# EAGLE board Qwiic_Spectral_Sensor-AS7265x-Panel (EAGLE 9.2.1), part 1 of 2
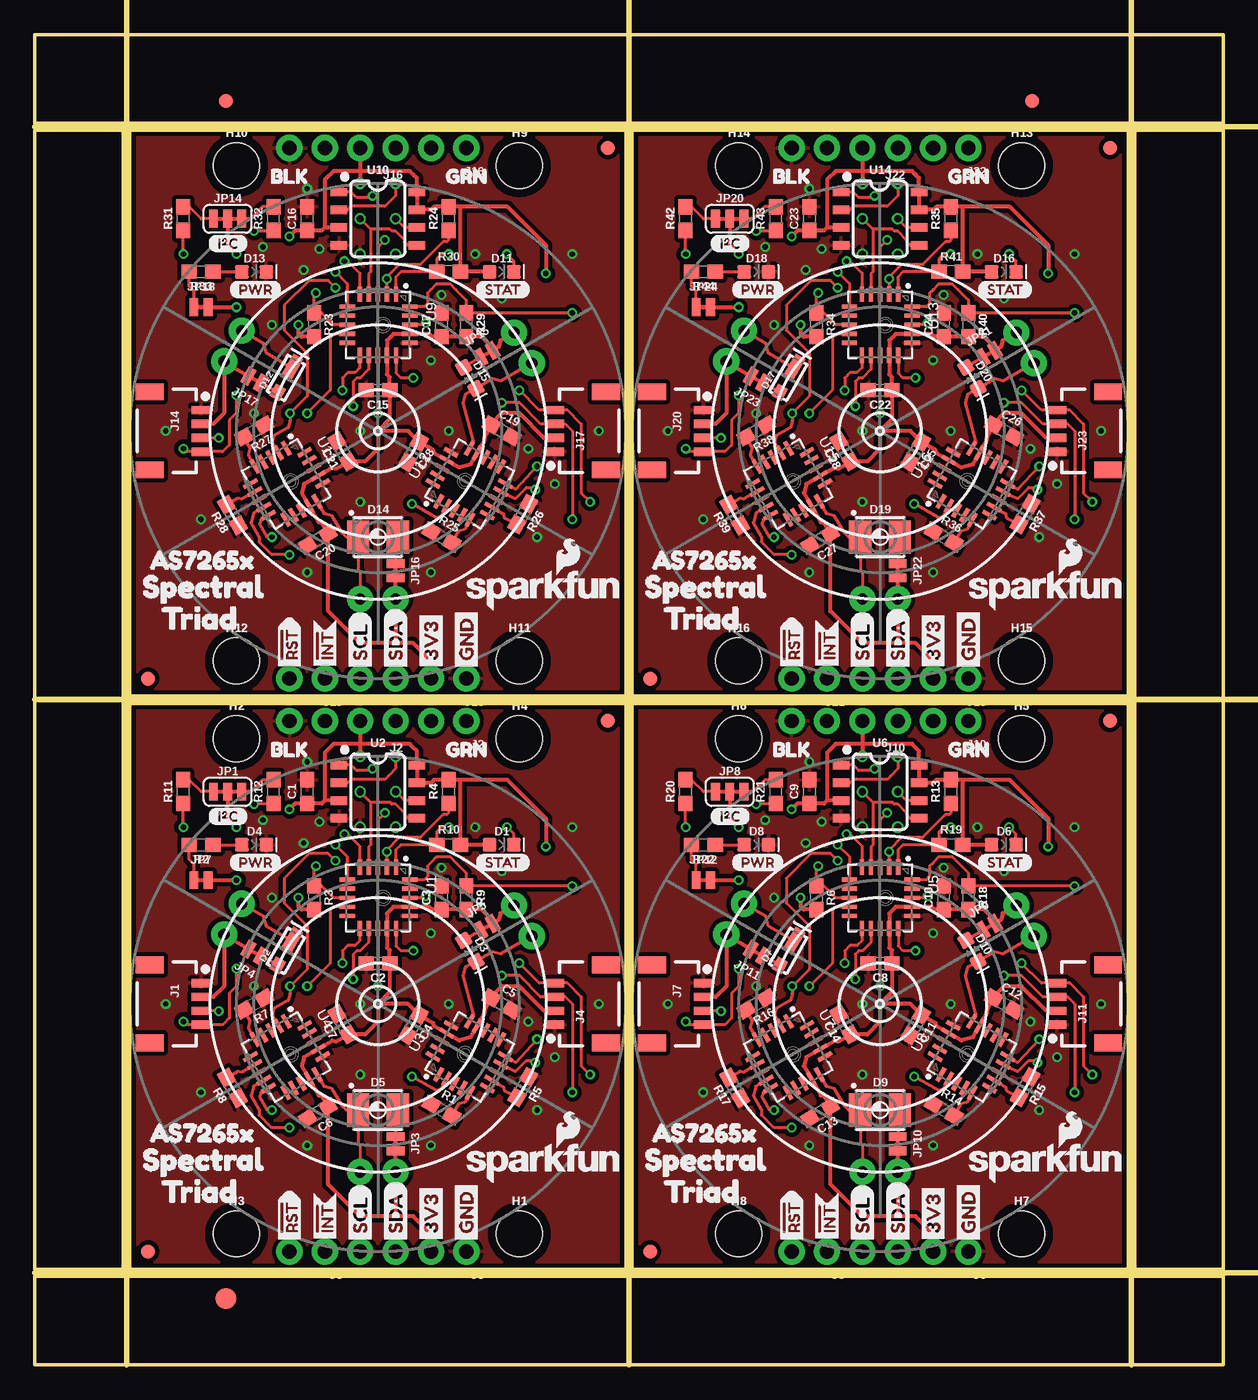
[diagram p0: board, top side]
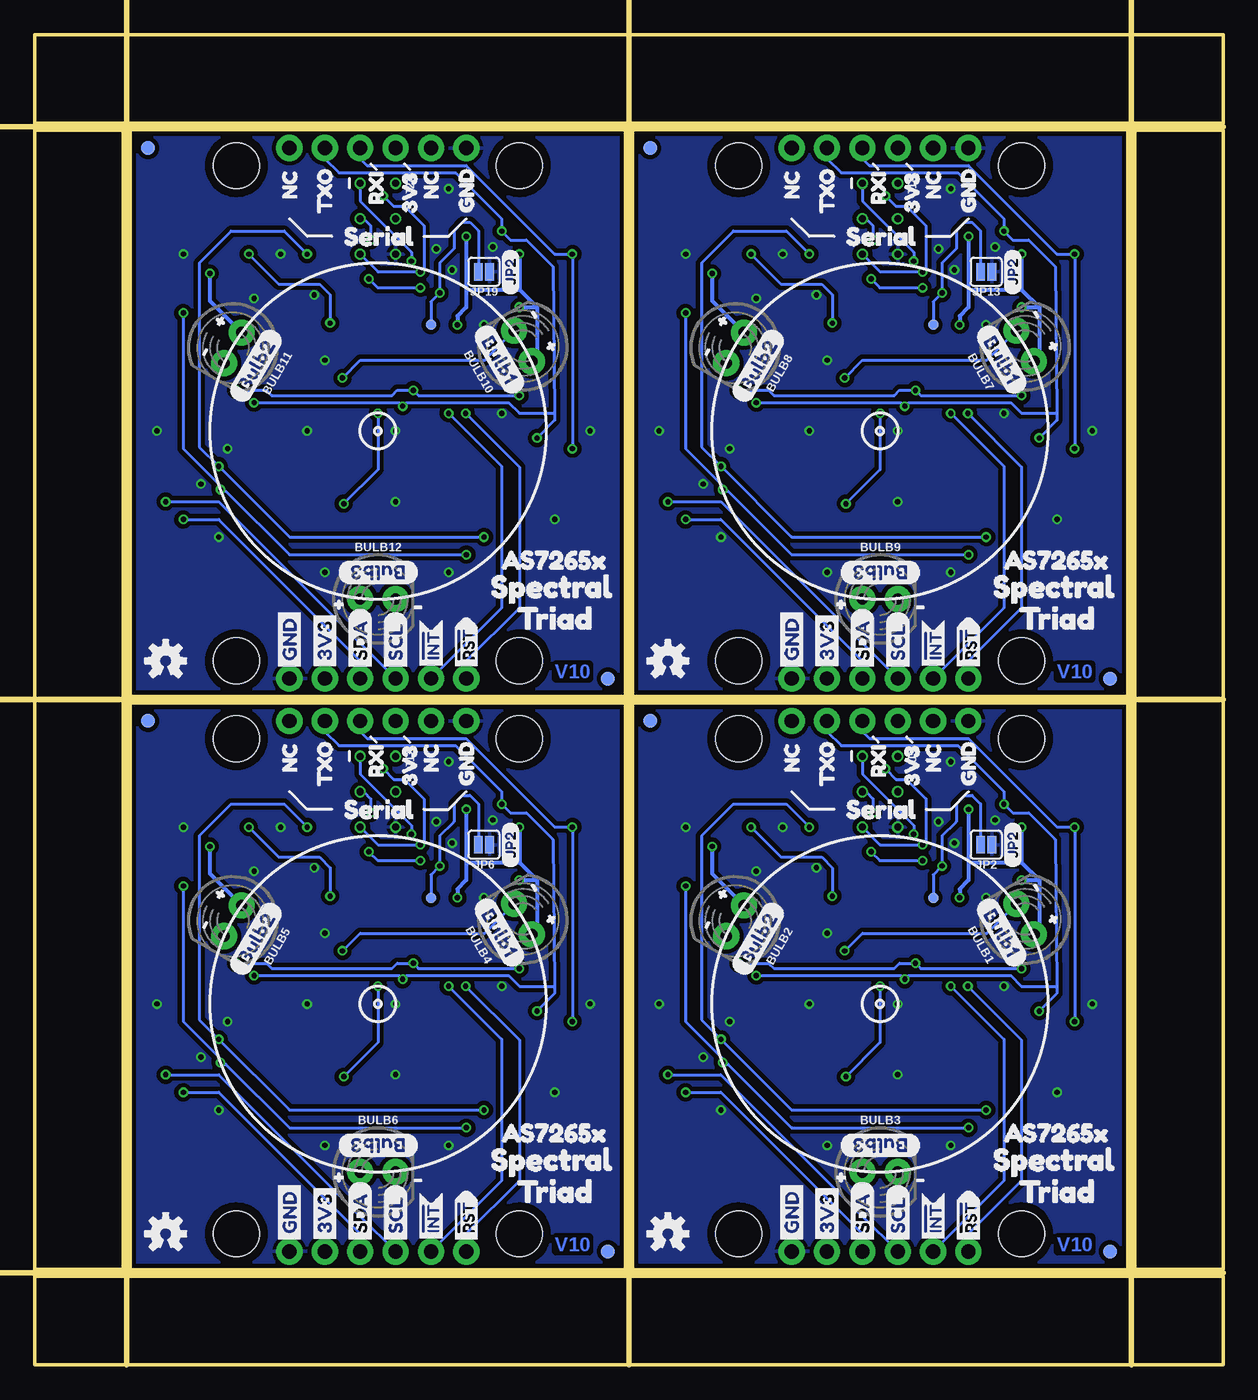
[diagram p1: board, bottom side, seen from below]

Size 85.34 x 95.5 mm. Coordinates in mm from the lower left corner, seen from the top.
Outline: 6.86,6.86 6.86,47.5 42.42,47.5 42.42,6.86 6.86,6.86
Outline: 42.93,6.86 42.93,47.5 78.49,47.5 78.49,6.86 42.93,6.86
Outline: 6.86,48.01 6.86,88.65 42.42,88.65 42.42,48.01 6.86,48.01
Outline: 42.93,48.01 42.93,88.65 78.49,88.65 78.49,48.01 42.93,48.01
Outline: 0,6.35 85.34,6.35 85.34,0 0,0 0,6.35
Outline: 78.99,88.65 85.34,88.65 85.34,6.86 78.99,6.86 78.99,88.65
Outline: 0,95.5 85.34,95.5 85.34,89.15 0,89.15 0,95.5
Outline: 0,88.65 6.35,88.65 6.35,6.86 0,6.86 0,88.65
Copper layers (1*16): Top 0.035mm / dielectric 1.5mm / Bottom 0.035mm
Design rules "SparkFun-2-layer-PCBWay-LIMIT": minimum track width 6mil, minimum drill 0.3mm, track to track 6mil, track to pad 6mil, pad to pad 6mil, via to via 6mil, smd to smd 6mil, copper to edge 6mil, drill to drill 6mil, minimum pad ring 6mil, minimum via ring 6mil, stop-mask expansion 4mil, vias tented up to drill 25mil, thermal gap 10mil
Net classes: 1 Power: width 0.305 mm
Milling: 6 lines

## Footprints (pad centres in the part's own frame; a part is rotated, then mirrored left to right if it is on the bottom)
LED_5MM_NOSILK = drill 0.813 pad 1.88: A -1.27,0; K 1.27,0
0603 = smd 1.1 x 1: 1 -0.85,0; 2 0.85,0
LED-0603 = smd 1 x 1: A -0.877,0; C 0.877,0
SUPER_BRIGHT_SMD_LED_3014 = smd 1 x 0.8: A -1.2,0 | smd 1.9 x 0.8: C 0.827,0
PLCC-2 = smd 1.6 x 2.4: A 1.425,0; C -1.425,0
FIDUCIAL-1X2 = smd 1 x 1: 1 0,0
FIDUCIAL-1.5X3 = smd 1.5 x 1.5: 1 0,0
STAND-OFF = hole 3.302: 0,0
1X04_1MM_RA = smd 0.6 x 1.35: 1 -1.5,0; 2 -0.5,0; 3 0.5,0; 4 1.5,0 | smd 1.2 x 2: NC1 2.8,-3.675; NC2 -2.8,-3.675
1X06_NO_SILK = drill 1.016 pad 1.88: 1 0,0; 2 2.54,0; 3 5.08,0; 4 7.62,0; 5 10.16,0; 6 12.7,0
1X02_NO_SILK = drill 1.016 pad 1.88: 1 0,0; 2 2.54,0
2X3_TEST_POINTS = drill 0.508: 1 -2.54,-1.27; 2 -2.54,1.27; 3 0,-1.27; 4 0,1.27; 5 2.54,-1.27; 6 2.54,1.27
1X04_NO_SILK = drill 1.016 pad 1.88: 1 0,0; 2 2.54,0; 3 5.08,0; 4 7.62,0
SMT-JUMPER_3_2-NC_TRACE_SILK = smd 0.635 x 1.27: 1 -1.016,0; 2 0,0; 3 1.016,0
SMT-JUMPER_2_NO_SILK = smd 0.635 x 1.27: 1 -0.406,0; 2 0.406,0
SMT-JUMPER_2_NC_TRACE_NO-SILK = smd 0.635 x 1.27: 1 -0.508,0; 2 0.508,0
PAD.03X.03 = smd 0.762 x 0.762: P$1 0,0
LGA20 = smd 1.1 x 0.3: 1 -2.2,1.3; 2 -2.2,0.65; 3 -2.2,0; 4 -2.2,-0.65; 5 -2.2,-1.3; 11 2.2,-1.3; 12 2.2,-0.65; 13 2.2,0; 14 2.2,0.65; 15 2.2,1.3 | smd 0.3 x 1.1: 6 -1.3,-2.2; 7 -0.65,-2.2; 8 0,-2.2; 9 0.65,-2.2; 10 1.3,-2.2; 16 1.3,2.3; 17 0.65,2.3; 18 0,2.3; 19 -0.65,2.3; 20 -1.3,2.3
SO08 = smd 0.6 x 1.2: 1 -1.905,-2.8; 2 -0.635,-2.8; 3 0.635,-2.8; 4 1.905,-2.8; 5 1.905,2.8; 6 0.635,2.8; 7 -0.635,2.8; 8 -1.905,2.8

## Placement (x,y rotation side)
BULB1  [LED_5MM_NOSILK]  14.22,32 120 bottom
BULB2  [LED_5MM_NOSILK]  35.05,31.88 240 bottom
BULB3  [LED_5MM_NOSILK]  24.64,13.84 0 bottom
BULB4  [LED_5MM_NOSILK]  50.29,32 120 bottom
BULB5  [LED_5MM_NOSILK]  71.12,31.88 240 bottom
BULB6  [LED_5MM_NOSILK]  60.71,13.84 0 bottom
BULB7  [LED_5MM_NOSILK]  14.22,73.15 120 bottom
BULB8  [LED_5MM_NOSILK]  35.05,73.02 240 bottom
BULB9  [LED_5MM_NOSILK]  24.64,54.99 0 bottom
BULB10  [LED_5MM_NOSILK]  50.29,73.15 120 bottom
BULB11  [LED_5MM_NOSILK]  71.12,73.02 240 bottom
BULB12  [LED_5MM_NOSILK]  60.71,54.99 0 bottom
C1  1.0uF  [0603]  19.56,41.15 90 top
C2  0.1uF  [0603]  24.64,28.83 180 top
C3  10uF  [0603]  29.21,33.53 90 top
C4  0.1uF  [0603]  27.18,24.38 240 top
C5  10uF  [0603]  33.53,25.91 330 top
C6  0.1uF  [0603]  20.33,18.12 210 top
C7  10uF  [0603]  22.11,24.45 120 top
C8  0.1uF  [0603]  60.71,28.83 180 top
C9  1.0uF  [0603]  55.63,41.15 90 top
C10  10uF  [0603]  65.28,33.53 90 top
C11  0.1uF  [0603]  63.25,24.38 240 top
C12  10uF  [0603]  69.6,25.91 330 top
C13  0.1uF  [0603]  56.4,18.12 210 top
C14  10uF  [0603]  58.18,24.45 120 top
C15  0.1uF  [0603]  24.64,69.98 180 top
C16  1.0uF  [0603]  19.56,82.3 90 top
C17  10uF  [0603]  29.21,74.68 90 top
C18  0.1uF  [0603]  27.18,65.53 240 top
C19  10uF  [0603]  33.53,67.06 330 top
C20  0.1uF  [0603]  20.33,59.26 210 top
C21  10uF  [0603]  22.11,65.6 120 top
C22  0.1uF  [0603]  60.71,69.98 180 top
C23  1.0uF  [0603]  55.63,82.3 90 top
C24  10uF  [0603]  65.28,74.68 90 top
C25  0.1uF  [0603]  63.25,65.53 240 top
C26  10uF  [0603]  69.6,67.06 330 top
C27  0.1uF  [0603]  56.4,59.26 210 top
C28  10uF  [0603]  58.18,65.6 120 top
D1  BLUE  [LED-0603]  33.53,37.34 0 top
D2  5700k  [SUPER_BRIGHT_SMD_LED_3014]  18.04,29.72 60 top
D3  IR  [LED-0603]  31.24,29.72 300 top
D4  RED  [LED-0603]  15.75,37.34 0 top
D5  UV  [PLCC-2]  24.64,18.29 0 top
D6  BLUE  [LED-0603]  69.6,37.34 0 top
D7  5700k  [SUPER_BRIGHT_SMD_LED_3014]  54.11,29.72 60 top
D8  RED  [LED-0603]  51.82,37.34 0 top
D9  UV  [PLCC-2]  60.71,18.29 0 top
D10  IR  [LED-0603]  67.31,29.72 300 top
D11  BLUE  [LED-0603]  33.53,78.49 0 top
D12  5700k  [SUPER_BRIGHT_SMD_LED_3014]  18.04,70.87 60 top
D13  RED  [LED-0603]  15.75,78.49 0 top
D14  UV  [PLCC-2]  24.64,59.44 0 top
D15  IR  [LED-0603]  31.24,70.87 300 top
D16  BLUE  [LED-0603]  69.6,78.49 0 top
D17  5700k  [SUPER_BRIGHT_SMD_LED_3014]  54.11,70.87 60 top
D18  RED  [LED-0603]  51.82,78.49 0 top
D19  UV  [PLCC-2]  60.71,59.44 0 top
D20  IR  [LED-0603]  67.31,70.87 300 top
E$1  [FIDUCIAL-1X2]  13.72,90.74 0 top
E$2  [FIDUCIAL-1X2]  71.63,90.74 0 top
E$3  [FIDUCIAL-1.5X3]  13.72,4.76 0 top
FD1  FIDUCIAL1X2  [FIDUCIAL-1X2]  8.13,8.13 0 top
FD2  FIDUCIAL1X2  [FIDUCIAL-1X2]  41.15,46.23 0 top
FD3  FIDUCIAL1X2  [FIDUCIAL-1X2]  41.15,46.23 0 bottom
FD4  FIDUCIAL1X2  [FIDUCIAL-1X2]  8.13,8.13 0 bottom
FD5  FIDUCIAL1X2  [FIDUCIAL-1X2]  44.2,8.13 0 top
FD6  FIDUCIAL1X2  [FIDUCIAL-1X2]  77.22,46.23 0 top
FD7  FIDUCIAL1X2  [FIDUCIAL-1X2]  77.22,46.23 0 bottom
FD8  FIDUCIAL1X2  [FIDUCIAL-1X2]  44.2,8.13 0 bottom
FD9  FIDUCIAL1X2  [FIDUCIAL-1X2]  8.13,49.28 0 top
FD10  FIDUCIAL1X2  [FIDUCIAL-1X2]  41.15,87.38 0 top
FD11  FIDUCIAL1X2  [FIDUCIAL-1X2]  41.15,87.38 0 bottom
FD12  FIDUCIAL1X2  [FIDUCIAL-1X2]  8.13,49.28 0 bottom
FD13  FIDUCIAL1X2  [FIDUCIAL-1X2]  44.2,49.28 0 top
FD14  FIDUCIAL1X2  [FIDUCIAL-1X2]  77.22,87.38 0 top
FD15  FIDUCIAL1X2  [FIDUCIAL-1X2]  77.22,87.38 0 bottom
FD16  FIDUCIAL1X2  [FIDUCIAL-1X2]  44.2,49.28 0 bottom
H1  STAND-OFF  [STAND-OFF]  34.8,9.4 0 top
H2  STAND-OFF  [STAND-OFF]  14.48,44.96 0 top
H3  STAND-OFF  [STAND-OFF]  14.48,9.4 0 top
H4  STAND-OFF  [STAND-OFF]  34.8,44.96 0 top
H5  STAND-OFF  [STAND-OFF]  70.87,44.96 0 top
H6  STAND-OFF  [STAND-OFF]  50.55,44.96 0 top
H7  STAND-OFF  [STAND-OFF]  70.87,9.4 0 top
H8  STAND-OFF  [STAND-OFF]  50.55,9.4 0 top
H9  STAND-OFF  [STAND-OFF]  34.8,86.11 0 top
H10  STAND-OFF  [STAND-OFF]  14.48,86.11 0 top
H11  STAND-OFF  [STAND-OFF]  34.8,50.55 0 top
H12  STAND-OFF  [STAND-OFF]  14.48,50.55 0 top
H13  STAND-OFF  [STAND-OFF]  70.87,86.11 0 top
H14  STAND-OFF  [STAND-OFF]  50.55,86.11 0 top
H15  STAND-OFF  [STAND-OFF]  70.87,50.55 0 top
H16  STAND-OFF  [STAND-OFF]  50.55,50.55 0 top
J1  [1X04_1MM_RA]  11.94,25.91 270 top
J2  Serial Interface  [1X06_NO_SILK]  30.99,46.23 180 top
J3  [1X02_NO_SILK]  20.83,8.13 180 top
J4  [1X04_1MM_RA]  37.34,25.91 90 top
J5  Flash Programming  [2X3_TEST_POINTS]  24.64,41.15 270 bottom
J6  PTH  [1X04_NO_SILK]  67.06,8.13 180 top
J7  [1X04_1MM_RA]  48.01,25.91 270 top
J8  PTH  [1X04_NO_SILK]  30.99,8.13 180 top
J9  [1X02_NO_SILK]  56.9,8.13 180 top
J10  Serial Interface  [1X06_NO_SILK]  67.06,46.23 180 top
J11  [1X04_1MM_RA]  73.41,25.91 90 top
J12  Flash Programming  [2X3_TEST_POINTS]  60.71,41.15 270 bottom
J13  PTH  [1X04_NO_SILK]  30.99,49.28 180 top
J14  [1X04_1MM_RA]  11.94,67.06 270 top
J15  [1X02_NO_SILK]  20.83,49.28 180 top
J16  Serial Interface  [1X06_NO_SILK]  30.99,87.38 180 top
J17  [1X04_1MM_RA]  37.34,67.06 90 top
J18  Flash Programming  [2X3_TEST_POINTS]  24.64,82.3 270 bottom
J19  PTH  [1X04_NO_SILK]  67.06,49.28 180 top
J20  [1X04_1MM_RA]  48.01,67.06 270 top
J21  [1X02_NO_SILK]  56.9,49.28 180 top
J22  Serial Interface  [1X06_NO_SILK]  67.06,87.38 180 top
J23  [1X04_1MM_RA]  73.41,67.06 90 top
J24  Flash Programming  [2X3_TEST_POINTS]  60.71,82.3 270 bottom
JP1  [SMT-JUMPER_3_2-NC_TRACE_SILK]  13.84,41.15 0 top
JP2  [SMT-JUMPER_2_NO_SILK]  17.02,37.34 180 bottom
JP3  [SMT-JUMPER_2_NC_TRACE_NO-SILK]  25.91,15.87 270 top
JP4  [SMT-JUMPER_2_NC_TRACE_NO-SILK]  15.79,29.59 150 top
JP5  [SMT-JUMPER_2_NC_TRACE_NO-SILK]  32.44,31.44 30 top
JP6  [SMT-JUMPER_2_NO_SILK]  53.09,37.34 180 bottom
JP7  [SMT-JUMPER_2_NC_TRACE_NO-SILK]  11.94,34.8 0 top
JP8  [SMT-JUMPER_3_2-NC_TRACE_SILK]  49.91,41.15 0 top
JP9  [SMT-JUMPER_2_NC_TRACE_NO-SILK]  68.51,31.44 30 top
JP10  [SMT-JUMPER_2_NC_TRACE_NO-SILK]  61.98,15.87 270 top
JP11  [SMT-JUMPER_2_NC_TRACE_NO-SILK]  51.85,29.59 150 top
JP12  [SMT-JUMPER_2_NC_TRACE_NO-SILK]  48.01,34.8 0 top
JP13  [SMT-JUMPER_2_NO_SILK]  17.02,78.49 180 bottom
JP14  [SMT-JUMPER_3_2-NC_TRACE_SILK]  13.84,82.3 0 top
JP15  [SMT-JUMPER_2_NC_TRACE_NO-SILK]  32.44,72.59 30 top
JP16  [SMT-JUMPER_2_NC_TRACE_NO-SILK]  25.91,57.02 270 top
JP17  [SMT-JUMPER_2_NC_TRACE_NO-SILK]  15.79,70.74 150 top
JP18  [SMT-JUMPER_2_NC_TRACE_NO-SILK]  11.94,75.95 0 top
JP19  [SMT-JUMPER_2_NO_SILK]  53.09,78.49 180 bottom
JP20  [SMT-JUMPER_3_2-NC_TRACE_SILK]  49.91,82.3 0 top
JP21  [SMT-JUMPER_2_NC_TRACE_NO-SILK]  68.51,72.59 30 top
JP22  [SMT-JUMPER_2_NC_TRACE_NO-SILK]  61.98,57.02 270 top
JP23  [SMT-JUMPER_2_NC_TRACE_NO-SILK]  51.85,70.74 150 top
JP24  [SMT-JUMPER_2_NC_TRACE_NO-SILK]  48.01,75.95 0 top
LOGO1  SFE_LOGO_NAME_FLAME.1_INCH  [SFE_LOGO_NAME_FLAME_.1]  36.58,14.48 0 top
LOGO2  OSHW-LOGOS  [OSHW-LOGO-S]  75.95,9.4 0 bottom
LOGO3  SFE_LOGO_NAME_FLAME.1_INCH  [SFE_LOGO_NAME_FLAME_.1]  72.64,14.48 0 top
LOGO4  OSHW-LOGOS  [OSHW-LOGO-S]  39.88,9.4 0 bottom
LOGO5  OSHW-LOGOS  [OSHW-LOGO-S]  39.88,50.55 0 bottom
LOGO6  SFE_LOGO_NAME_FLAME.1_INCH  [SFE_LOGO_NAME_FLAME_.1]  36.58,55.63 0 top
LOGO7  OSHW-LOGOS  [OSHW-LOGO-S]  75.95,50.55 0 bottom
LOGO8  SFE_LOGO_NAME_FLAME.1_INCH  [SFE_LOGO_NAME_FLAME_.1]  72.64,55.63 0 top
R1  10k  [0603]  29.21,18.29 330 top
R2  1k  [0603]  11.94,37.34 180 top
R3  10k  [0603]  20.07,33.53 270 top
R4  10k  [0603]  29.72,41.15 90 top
R5  10k  [0603]  35.05,19.94 240 top
R6  10k  [0603]  56.13,33.53 270 top
R7  10k  [0603]  15.75,25.91 210 top
R8  10k  [0603]  14.19,19.88 120 top
R9  2.2k  [0603]  30.99,33.53 270 top
R10  2.2k  [0603]  29.72,37.34 0 top
R11  2.2k  [0603]  10.67,41.15 90 top
R12  2.2k  [0603]  17.14,41.15 90 top
R13  10k  [0603]  65.79,41.15 90 top
R14  10k  [0603]  65.28,18.29 330 top
R15  10k  [0603]  71.12,19.94 240 top
R16  10k  [0603]  51.82,25.91 210 top
R17  10k  [0603]  50.26,19.88 120 top
R18  2.2k  [0603]  67.06,33.53 270 top
R19  2.2k  [0603]  65.79,37.34 0 top
R20  2.2k  [0603]  46.74,41.15 90 top
R21  2.2k  [0603]  53.21,41.15 90 top
R22  1k  [0603]  48.01,37.34 180 top
R23  10k  [0603]  20.07,74.68 270 top
R24  10k  [0603]  29.72,82.3 90 top
R25  10k  [0603]  29.21,59.44 330 top
R26  10k  [0603]  35.05,61.09 240 top
R27  10k  [0603]  15.75,67.06 210 top
R28  10k  [0603]  14.19,61.02 120 top
R29  2.2k  [0603]  30.99,74.68 270 top
R30  2.2k  [0603]  29.72,78.49 0 top
R31  2.2k  [0603]  10.67,82.3 90 top
R32  2.2k  [0603]  17.14,82.3 90 top
R33  1k  [0603]  11.94,78.49 180 top
R34  10k  [0603]  56.13,74.68 270 top
R35  10k  [0603]  65.79,82.3 90 top
R36  10k  [0603]  65.28,59.44 330 top
R37  10k  [0603]  71.12,61.09 240 top
R38  10k  [0603]  51.82,67.06 210 top
R39  10k  [0603]  50.26,61.02 120 top
R40  2.2k  [0603]  67.06,74.68 270 top
R41  2.2k  [0603]  65.79,78.49 0 top
R42  2.2k  [0603]  46.74,82.3 90 top
R43  2.2k  [0603]  53.21,82.3 90 top
R44  1k  [0603]  48.01,78.49 180 top
TP1  [PAD.03X.03]  20.83,33.53 0 bottom
TP2  [PAD.03X.03]  56.9,33.53 0 bottom
TP3  [PAD.03X.03]  20.83,74.68 0 bottom
TP4  [PAD.03X.03]  56.9,74.68 0 bottom
U1  AS72651  [LGA20]  24.64,33.53 270 top
U2  4MB Flash  [SO08]  24.64,41.15 270 top
U3  AS72652  [LGA20]  31.24,22.1 60 top
U4  AS72653  [LGA20]  18.04,22.1 300 top
U5  AS72651  [LGA20]  60.71,33.53 270 top
U6  4MB Flash  [SO08]  60.71,41.15 270 top
U7  AS72653  [LGA20]  54.11,22.1 300 top
U8  AS72652  [LGA20]  67.3,22.1 60 top
U9  AS72651  [LGA20]  24.64,74.68 270 top
U10  4MB Flash  [SO08]  24.64,82.3 270 top
U11  AS72653  [LGA20]  18.04,63.25 300 top
U12  AS72652  [LGA20]  31.24,63.25 60 top
U13  AS72651  [LGA20]  60.71,74.68 270 top
U14  4MB Flash  [SO08]  60.71,82.3 270 top
U15  AS72653  [LGA20]  54.11,63.25 300 top
U16  AS72652  [LGA20]  67.3,63.25 60 top
U$1  [#0]  36.7,32.77 60 bottom
U$2  [I_SUPER2_C-()-03]  12.45,39.37 0 top
U$3  [PWR-()-03]  13.97,36.07 0 top
U$4  [AS7265X0]  7.11,16.64 0 top
U$5  [BULB15]  17.27,33.4 300 bottom
U$6  [BULB26]  34.92,27.94 60 bottom
U$7  [BULB37]  21.72,15.75 180 bottom
U$8  [JP20]  15.11,35.69 90 bottom
U$9  [SPECTRAL1]  6.35,14.73 0 top
U$10  [STAT4]  31.62,36.07 0 top
U$11  [TRIAD2]  7.75,12.45 0 top
U$12  [TRIAD2]  16,12.45 0 bottom
U$13  [SPECTRAL1]  17.91,14.73 0 bottom
U$14  [AS7265X0]  16.89,16.64 0 bottom
U$15  [3V33]  22.35,40.51 90 bottom
U$16  [BLK7]  16,44.2 0 top
U$17  [GND5]  18.29,40.77 90 bottom
U$18  [GRN6]  28.45,44.2 0 top
U$19  [NC4]  30.99,41.66 90 bottom
U$20  [NC4]  20.83,41.66 90 bottom
U$21  [RXI2]  24.76,41.27 90 bottom
U$22  [SERIAL0]  28.19,39.88 0 bottom
U$23  [TXO1]  28.45,40.64 90 bottom
U$24  [3V3-04]  28.45,8.51 90 bottom
U$25  [GND-04]  30.99,8.51 90 bottom
U$26  [SDA-[)]  25.91,8.51 90 bottom
U$27  [SCL-[)]  23.37,8.51 90 bottom
U$28  [INT#-[<-04]  20.83,8.38 90 bottom
U$29  [RST#-[>-04]  18.29,8.38 90 bottom
U$30  [GND-04]  30.99,8.51 90 top
U$31  [3V3-04]  28.45,8.51 90 top
U$32  [SDA-[)]  25.91,8.51 90 top
U$33  [SCL-[)]  23.37,8.51 90 top
U$34  [INT#-[<-04]  20.83,8.38 90 top
U$35  [RST#-[>-04]  18.29,8.38 90 top
U$36  [#0]  12.7,33.15 300 bottom
U$37  [#0]  28.7,13.59 0 bottom
U$38  [#1]  22.99,13.46 0 bottom
U$39  [#1]  13.84,35.43 300 bottom
U$40  [#1]  37.85,30.61 60 bottom
U$41  [I_SUPER2_C-()-03]  48.51,39.37 0 top
U$42  [PWR-()-03]  50.04,36.07 0 top
U$43  [AS7265X0]  43.18,16.64 0 top
U$44  [BULB15]  53.34,33.4 300 bottom
U$45  [BULB26]  70.99,27.94 60 bottom
U$46  [BULB37]  57.78,15.75 180 bottom
U$47  [SPECTRAL1]  42.42,14.73 0 top
U$48  [STAT4]  67.69,36.07 0 top
U$49  [TRIAD2]  43.81,12.45 0 top
U$50  [TRIAD2]  52.07,12.45 0 bottom
U$51  [SPECTRAL1]  53.97,14.73 0 bottom
U$52  [AS7265X0]  52.96,16.64 0 bottom
U$53  [3V33]  58.42,40.51 90 bottom
U$54  [BLK7]  52.07,44.2 0 top
U$55  [GND5]  54.36,40.77 90 bottom
U$56  [GRN6]  64.52,44.2 0 top
U$57  [NC4]  67.06,41.66 90 bottom
U$58  [NC4]  56.9,41.66 90 bottom
U$59  [RXI2]  60.83,41.27 90 bottom
U$60  [SERIAL0]  64.26,39.88 0 bottom
U$61  [TXO1]  64.52,40.64 90 bottom
U$62  [JP20]  51.18,35.69 90 bottom
U$63  [3V3-04]  64.52,8.51 90 bottom
U$64  [GND-04]  67.06,8.51 90 bottom
U$65  [SDA-[)]  61.98,8.51 90 bottom
U$66  [SCL-[)]  59.44,8.51 90 bottom
U$67  [INT#-[<-04]  56.9,8.38 90 bottom
U$68  [RST#-[>-04]  54.36,8.38 90 bottom
U$69  [GND-04]  67.06,8.51 90 top
U$70  [3V3-04]  64.52,8.51 90 top
U$71  [SDA-[)]  61.98,8.51 90 top
U$72  [SCL-[)]  59.44,8.51 90 top
U$73  [INT#-[<-04]  56.9,8.38 90 top
U$74  [RST#-[>-04]  54.36,8.38 90 top
U$75  [#0]  72.77,32.77 60 bottom
U$76  [#0]  48.77,33.15 300 bottom
U$77  [#0]  64.77,13.59 0 bottom
U$78  [#1]  59.05,13.46 0 bottom
U$79  [#1]  49.91,35.43 300 bottom
U$80  [#1]  73.91,30.61 60 bottom
U$81  [I_SUPER2_C-()-03]  12.45,80.52 0 top
U$82  [PWR-()-03]  13.97,77.22 0 top
U$83  [AS7265X0]  7.11,57.78 0 top
U$84  [BULB15]  17.27,74.55 300 bottom
U$85  [BULB26]  34.92,69.09 60 bottom
U$86  [BULB37]  21.72,56.9 180 bottom
U$87  [SPECTRAL1]  6.35,55.88 0 top
U$88  [STAT4]  31.62,77.22 0 top
U$89  [TRIAD2]  7.75,53.59 0 top
U$90  [TRIAD2]  16,53.59 0 bottom
U$91  [SPECTRAL1]  17.91,55.88 0 bottom
U$92  [AS7265X0]  16.89,57.78 0 bottom
U$93  [3V33]  22.35,81.66 90 bottom
U$94  [BLK7]  16,85.34 0 top
U$95  [GND5]  18.29,81.91 90 bottom
U$96  [GRN6]  28.45,85.34 0 top
U$97  [NC4]  30.99,82.8 90 bottom
U$98  [NC4]  20.83,82.8 90 bottom
U$99  [RXI2]  24.76,82.42 90 bottom
U$100  [SERIAL0]  28.19,81.03 0 bottom
U$101  [TXO1]  28.45,81.79 90 bottom
U$102  [JP20]  15.11,76.83 90 bottom
U$103  [3V3-04]  28.45,49.66 90 bottom
U$104  [GND-04]  30.99,49.66 90 bottom
U$105  [SDA-[)]  25.91,49.66 90 bottom
U$106  [SCL-[)]  23.37,49.66 90 bottom
U$107  [INT#-[<-04]  20.83,49.53 90 bottom
U$108  [RST#-[>-04]  18.29,49.53 90 bottom
U$109  [GND-04]  30.99,49.66 90 top
U$110  [3V3-04]  28.45,49.66 90 top
U$111  [SDA-[)]  25.91,49.66 90 top
U$112  [SCL-[)]  23.37,49.66 90 top
U$113  [INT#-[<-04]  20.83,49.53 90 top
U$114  [RST#-[>-04]  18.29,49.53 90 top
U$115  [#0]  36.7,73.91 60 bottom
U$116  [#0]  12.7,74.29 300 bottom
U$117  [#0]  28.7,54.74 0 bottom
U$118  [#1]  22.99,54.61 0 bottom
U$119  [#1]  13.84,76.58 300 bottom
U$120  [#1]  37.85,71.75 60 bottom
U$121  [I_SUPER2_C-()-03]  48.51,80.52 0 top
U$122  [PWR-()-03]  50.04,77.22 0 top
U$123  [AS7265X0]  43.18,57.78 0 top
U$124  [BULB15]  53.34,74.55 300 bottom
U$125  [BULB26]  70.99,69.09 60 bottom
U$126  [BULB37]  57.78,56.9 180 bottom
U$127  [SPECTRAL1]  42.42,55.88 0 top
U$128  [STAT4]  67.69,77.22 0 top
U$129  [TRIAD2]  43.81,53.59 0 top
U$130  [TRIAD2]  52.07,53.59 0 bottom
U$131  [SPECTRAL1]  53.97,55.88 0 bottom
U$132  [AS7265X0]  52.96,57.78 0 bottom
U$133  [3V33]  58.42,81.66 90 bottom
U$134  [BLK7]  52.07,85.34 0 top
U$135  [GND5]  54.36,81.91 90 bottom
U$136  [GRN6]  64.52,85.34 0 top
U$137  [NC4]  67.06,82.8 90 bottom
U$138  [NC4]  56.9,82.8 90 bottom
U$139  [RXI2]  60.83,82.42 90 bottom
U$140  [SERIAL0]  64.26,81.03 0 bottom
U$141  [TXO1]  64.52,81.79 90 bottom
U$142  [JP20]  51.18,76.83 90 bottom
U$143  [3V3-04]  64.52,49.66 90 bottom
U$144  [GND-04]  67.06,49.66 90 bottom
U$145  [SDA-[)]  61.98,49.66 90 bottom
U$146  [SCL-[)]  59.44,49.66 90 bottom
U$147  [INT#-[<-04]  56.9,49.53 90 bottom
U$148  [RST#-[>-04]  54.36,49.53 90 bottom
U$149  [GND-04]  67.06,49.66 90 top
U$150  [3V3-04]  64.52,49.66 90 top
U$151  [SDA-[)]  61.98,49.66 90 top
U$152  [SCL-[)]  59.44,49.66 90 top
U$153  [INT#-[<-04]  56.9,49.53 90 top
U$154  [RST#-[>-04]  54.36,49.53 90 top
U$155  [#0]  72.77,73.91 60 bottom
U$156  [#0]  48.77,74.29 300 bottom
U$157  [#0]  64.77,54.74 0 bottom
U$158  [#1]  59.05,54.61 0 bottom
U$159  [#1]  49.91,76.58 300 bottom
U$160  [#1]  73.91,71.75 60 bottom

## Library data of the parts
BULB1-BULB12 = SparkX
C1 C9 C16 C23 = SparkFun-Capacitors; PROD_ID: CAP-00868
C2 C4 C6 C8 C11 C13 C15 C18 C20 C22 C25 C27 = SparkFun-Capacitors; PROD_ID: CAP-00810
C3 C5 C7 C10 C12 C14 C17 C19 C21 C24 C26 C28 = SparkFun-Capacitors; PROD_ID: CAP-11015
D1 D6 D11 D16 = SparkFun-LED; PROD_ID: DIO-08575
D2 D7 D12 D17 = SparkFun-LED; PROD_ID: DIO-13728; VALUE: White, 60mA
D3 D10 D15 D20 = SparkFun-LED; PROD_ID: DIO-14125
D4 D8 D13 D18 = SparkFun-LED; PROD_ID: DIO-00819
D5 D9 D14 D19 = SparkFun-LED; PROD_ID: DIO-14126
E$1 E$2 FD1-FD16 LOGO1-LOGO8 = SparkFun-Aesthetics
E$3 = SparkFun-Retired
H1-H16 = SparkFun-Hardware
J1 J4 J7 J11 J14 J17 J20 J23 = SparkFun-Connectors; PROD_ID: CONN-13694
J2 J10 J16 J22 = SparkFun-Connectors; PROD_ID: CONN-08437
J3 J5 J6 J8 J9 J12 J13 J15 J18 J19 J21 J24 TP1-TP4 = SparkFun-Connectors
JP1-JP24 = SparkFun-Jumpers
R1 R3-R8 R13-R17 R23-R28 R34-R39 = SparkFun-Resistors; PROD_ID: RES-00824
R2 R22 R33 R44 = SparkFun-Resistors; PROD_ID: RES-07856
R9-R12 R18-R21 R29-R32 R40-R43 = SparkFun-Resistors; PROD_ID: RES-08272
U1 U5 U9 U13 = Qwiic_Spectral_Sensor-AS7265x; PROD_ID: IC-14127
U2 U6 U10 U14 = SparkFun-IC-Memory; PROD_ID: IC-12455
U3 U8 U12 U16 = Qwiic_Spectral_Sensor-AS7265x; PROD_ID: IC-14128
U4 U7 U11 U15 = Qwiic_Spectral_Sensor-AS7265x; PROD_ID: IC-14129
U$1 U$36-U$40 U$75-U$80 U$115-U$120 U$155-U$160 = buzzard_labels (7)
U$2 U$3 U$24-U$35 U$41 U$42 U$63-U$74 U$81 U$82 U$103-U$114 U$121 U$122 U$143-U$154 = Labels
U$4-U$7 U$9-U$14 U$43-U$52 U$83-U$92 U$123-U$132 = buzzard_labels (50)
U$8 U$62 U$102 U$142 = buzzard_labels (52)
U$15-U$23 U$53-U$61 U$93-U$101 U$133-U$141 = buzzard_labels (51)

## Nets
3.3V [Power]: BULB1.A BULB2.A BULB3.A C1.1 C2.1 C3.1 C4.1 C5.1 C6.1 C7.1 D1.A J1.2 J2.4 J4.2 J5.2 J8.2 JP1.2 JP3.2 JP4.2 JP5.2 JP7.2 R3.2 R4.2 R9.2 R10.2 U1.14 U1.17 U2.3 U2.7 U2.8 U3.14 U3.17 U4.14 U4.17
3.3V1 [Power]: BULB4.A BULB5.A BULB6.A C8.1 C9.1 C10.1 C11.1 C12.1 C13.1 C14.1 D6.A J6.2 J7.2 J10.4 J11.2 J12.2 JP8.2 JP9.2 JP10.2 JP11.2 JP12.2 R6.2 R13.2 R18.2 R19.2 U5.14 U5.17 U6.3 U6.7 U6.8 U7.14 U7.17 U8.14 U8.17
3.3V2 [Power]: BULB7.A BULB8.A BULB9.A C15.1 C16.1 C17.1 C18.1 C19.1 C20.1 C21.1 D11.A J13.2 J14.2 J16.4 J17.2 J18.2 JP14.2 JP15.2 JP16.2 JP17.2 JP18.2 R23.2 R24.2 R29.2 R30.2 U9.14 U9.17 U10.3 U10.7 U10.8 U11.14 U11.17 U12.14 U12.17
3.3V3 [Power]: BULB10.A BULB11.A BULB12.A C22.1 C23.1 C24.1 C25.1 C26.1 C27.1 C28.1 D16.A J19.2 J20.2 J22.4 J23.2 J24.2 JP20.2 JP21.2 JP22.2 JP23.2 JP24.2 R34.2 R35.2 R40.2 R41.2 U13.14 U13.17 U14.3 U14.7 U14.8 U15.14 U15.17 U16.14 U16.17
!CS_EE: J5.5 U1.6 U2.1
!CS_EE1: J12.5 U5.6 U6.1
!CS_EE2: J18.5 U9.6 U10.1
!CS_EE3: J24.5 U13.6 U14.1
!INT: J3.1 U1.9
!INT1: J9.1 U5.9
!INT2: J15.1 U9.9
!INT3: J21.1 U13.9
!RST: J3.2 R4.1 U1.2 U4.2
!RST1: J9.2 R13.1 U5.2 U7.2
!RST2: J15.2 R24.1 U9.2 U11.2
!RST3: J21.2 R35.1 U13.2 U15.2
!RST-ADDR: U1.13 U3.2
!RST-ADDR1: U5.13 U8.2
!RST-ADDR2: U9.13 U12.2
!RST-ADDR3: U13.13 U16.2
GND: C1.2 C2.2 C3.2 C4.2 C5.2 C6.2 C7.2 D4.C J1.1 J2.6 J4.1 J5.6 J8.1 JP2.1 R1.1 R5.1 R7.1 R8.1 U1.16 U2.4 U3.16 U4.16
GND1: C8.2 C9.2 C10.2 C11.2 C12.2 C13.2 C14.2 D8.C J6.1 J7.1 J10.6 J11.1 J12.6 JP6.1 R14.1 R15.1 R16.1 R17.1 U5.16 U6.4 U7.16 U8.16
GND2: C15.2 C16.2 C17.2 C18.2 C19.2 C20.2 C21.2 D13.C J13.1 J14.1 J16.6 J17.1 J18.6 JP13.1 R25.1 R26.1 R27.1 R28.1 U9.16 U10.4 U11.16 U12.16
GND3: C22.2 C23.2 C24.2 C25.2 C26.2 C27.2 C28.2 D18.C J19.1 J20.1 J22.6 J23.1 J24.6 JP19.1 R36.1 R37.1 R38.1 R39.1 U13.16 U14.4 U15.16 U16.16
I2C_ENB: JP2.2 R3.1 TP1.P$1 U1.8
I2C_ENB1: JP6.2 R6.1 TP2.P$1 U5.8
I2C_ENB2: JP13.2 R23.1 TP3.P$1 U9.8
I2C_ENB3: JP19.2 R34.1 TP4.P$1 U13.8
LED_DRV: BULB1.K D2.C U1.15
LED_DRV1: BULB2.K D3.C U3.15
LED_DRV2: BULB3.K D5.C U4.15
LED_DRV3: BULB4.K D7.C U5.15
LED_DRV4: BULB5.K D10.C U8.15
LED_DRV5: BULB6.K D9.C U7.15
LED_DRV6: BULB7.K D12.C U9.15
LED_DRV7: BULB8.K D15.C U12.15
LED_DRV8: BULB9.K D14.C U11.15
LED_DRV9: BULB10.K D17.C U13.15
LED_DRV10: BULB11.K D20.C U16.15
LED_DRV11: BULB12.K D19.C U15.15
MISO: J5.1 U1.5 U2.2
MISO1: J12.1 U5.5 U6.2
MISO2: J18.1 U9.5 U10.2
MISO3: J24.1 U13.5 U14.2
MOSI: J5.4 U1.4 U2.5
MOSI1: J12.4 U5.4 U6.5
MOSI2: J18.4 U9.4 U10.5
MOSI3: J24.4 U13.4 U14.5
N$1: JP7.1 R2.2
N$2: D1.C U1.18
N$3: R5.2 U3.7
N$4: JP1.3 R12.2
N$5: JP1.1 R11.2
N$6: D2.A JP4.1
N$7: D4.A R2.1
N$8: D3.A JP5.1
N$9: R1.2 U3.5
N$10: JP8.3 R21.2
N$11: D5.A JP3.1
N$12: R8.2 U4.7
N$13: R7.2 U4.5
N$14: JP8.1 R20.2
N$15: D6.C U5.18
N$16: D7.A JP11.1
N$17: D10.A JP9.1
N$18: R15.2 U8.7
N$19: R14.2 U8.5
N$20: D9.A JP10.1
N$21: R17.2 U7.7
N$22: R16.2 U7.5
N$23: JP12.1 R22.2
N$24: D8.A R22.1
N$25: JP14.3 R32.2
N$26: JP14.1 R31.2
N$27: D11.C U9.18
N$28: D12.A JP17.1
N$29: D15.A JP15.1
N$30: R26.2 U12.7
N$31: R25.2 U12.5
N$32: D14.A JP16.1
N$33: R28.2 U11.7
N$34: R27.2 U11.5
N$35: JP18.1 R33.2
N$36: D13.A R33.1
N$37: JP20.3 R43.2
N$38: JP20.1 R42.2
N$39: D16.C U13.18
N$40: D17.A JP23.1
N$41: D20.A JP21.1
N$42: R37.2 U16.7
N$43: R36.2 U16.5
N$44: D19.A JP22.1
N$45: R39.2 U15.7
N$46: R38.2 U15.5
N$47: JP24.1 R44.2
N$48: D18.A R44.1
RX/SCL: J1.4 J2.3 J4.4 J8.4 R11.1 U1.11
RX/SCL1: J6.4 J7.4 J10.3 J11.4 R20.1 U5.11
RX/SCL2: J13.4 J14.4 J16.3 J17.4 R31.1 U9.11
RX/SCL3: J19.4 J20.4 J22.3 J23.4 R42.1 U13.11
SCK: J5.3 U1.3 U2.6
SCK1: J12.3 U5.3 U6.6
SCK2: J18.3 U9.3 U10.6
SCK3: J24.3 U13.3 U14.6
SCL_S: R9.1 U1.20 U3.9 U4.9
SCL_S1: R18.1 U5.20 U7.9 U8.9
SCL_S2: R29.1 U9.20 U11.9 U12.9
SCL_S3: R40.1 U13.20 U15.9 U16.9
SDA_S: R10.1 U1.1 U3.10 U4.10
SDA_S1: R19.1 U5.1 U7.10 U8.10
SDA_S2: R30.1 U9.1 U11.10 U12.10
SDA_S3: R41.1 U13.1 U15.10 U16.10
TX/SDA: J1.3 J2.2 J4.3 J8.3 R12.1 U1.12
TX/SDA1: J6.3 J7.3 J10.2 J11.3 R21.1 U5.12
TX/SDA2: J13.3 J14.3 J16.2 J17.3 R32.1 U9.12
TX/SDA3: J19.3 J20.3 J22.2 J23.3 R43.1 U13.12